# Altium PCB main.PcbDoc
Units mm, origin at the board's own origin, x right, y up, seen from the top; angles counter-clockwise.
Board outline 24 x 36 mm, 4 copper layers (Top Layer, Layer 1, Layer 2, Bottom Layer), stack 0.603 mm thick; 51 components, 58 nets, 239 pads, 65 vias.
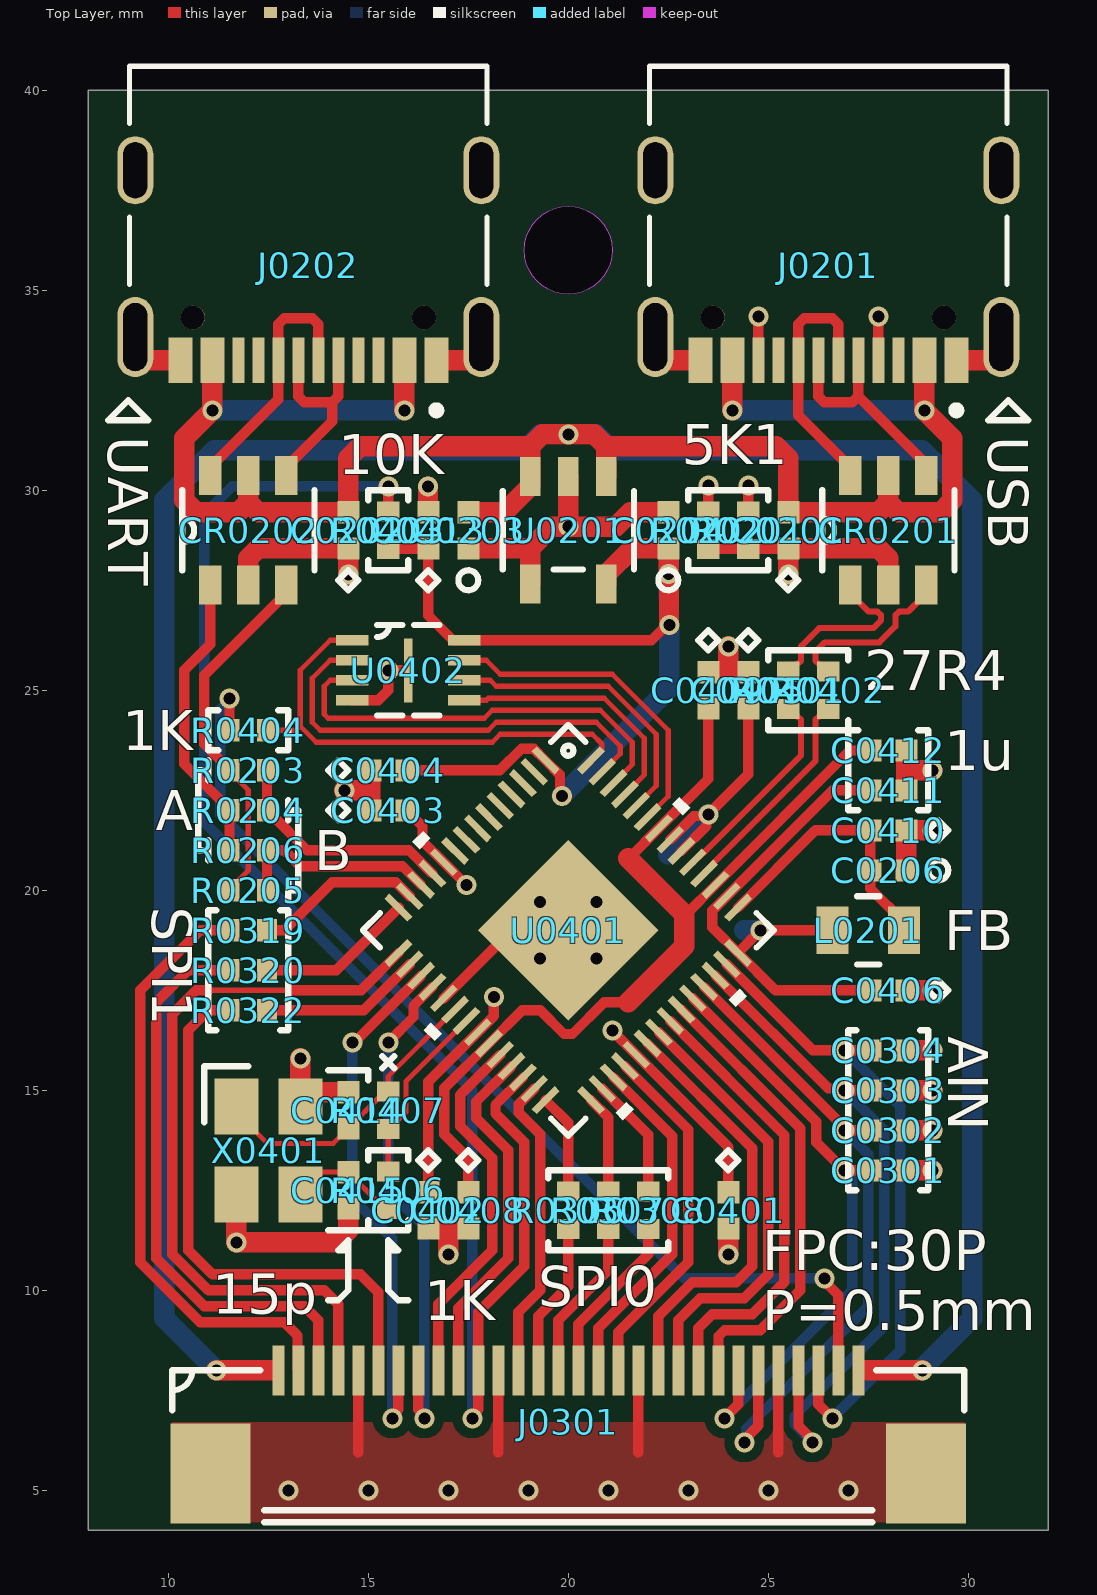
[diagram p0: Top Layer view]
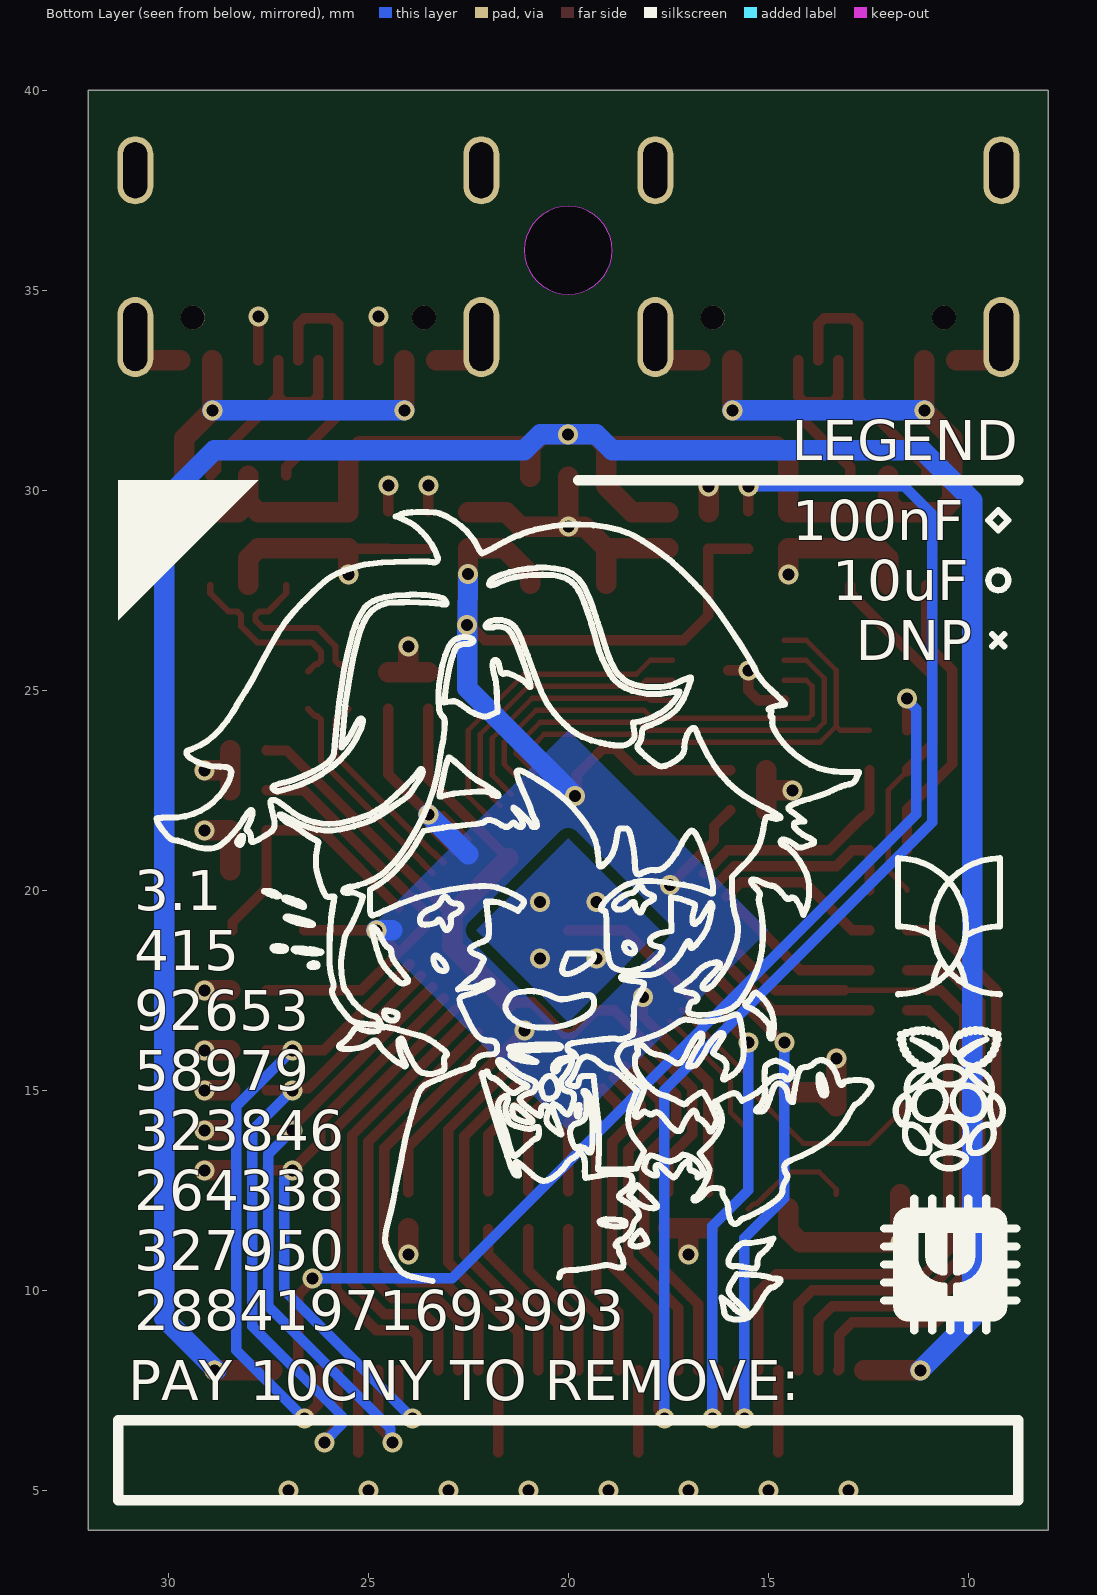
[diagram p1: Bottom Layer view, seen from below]
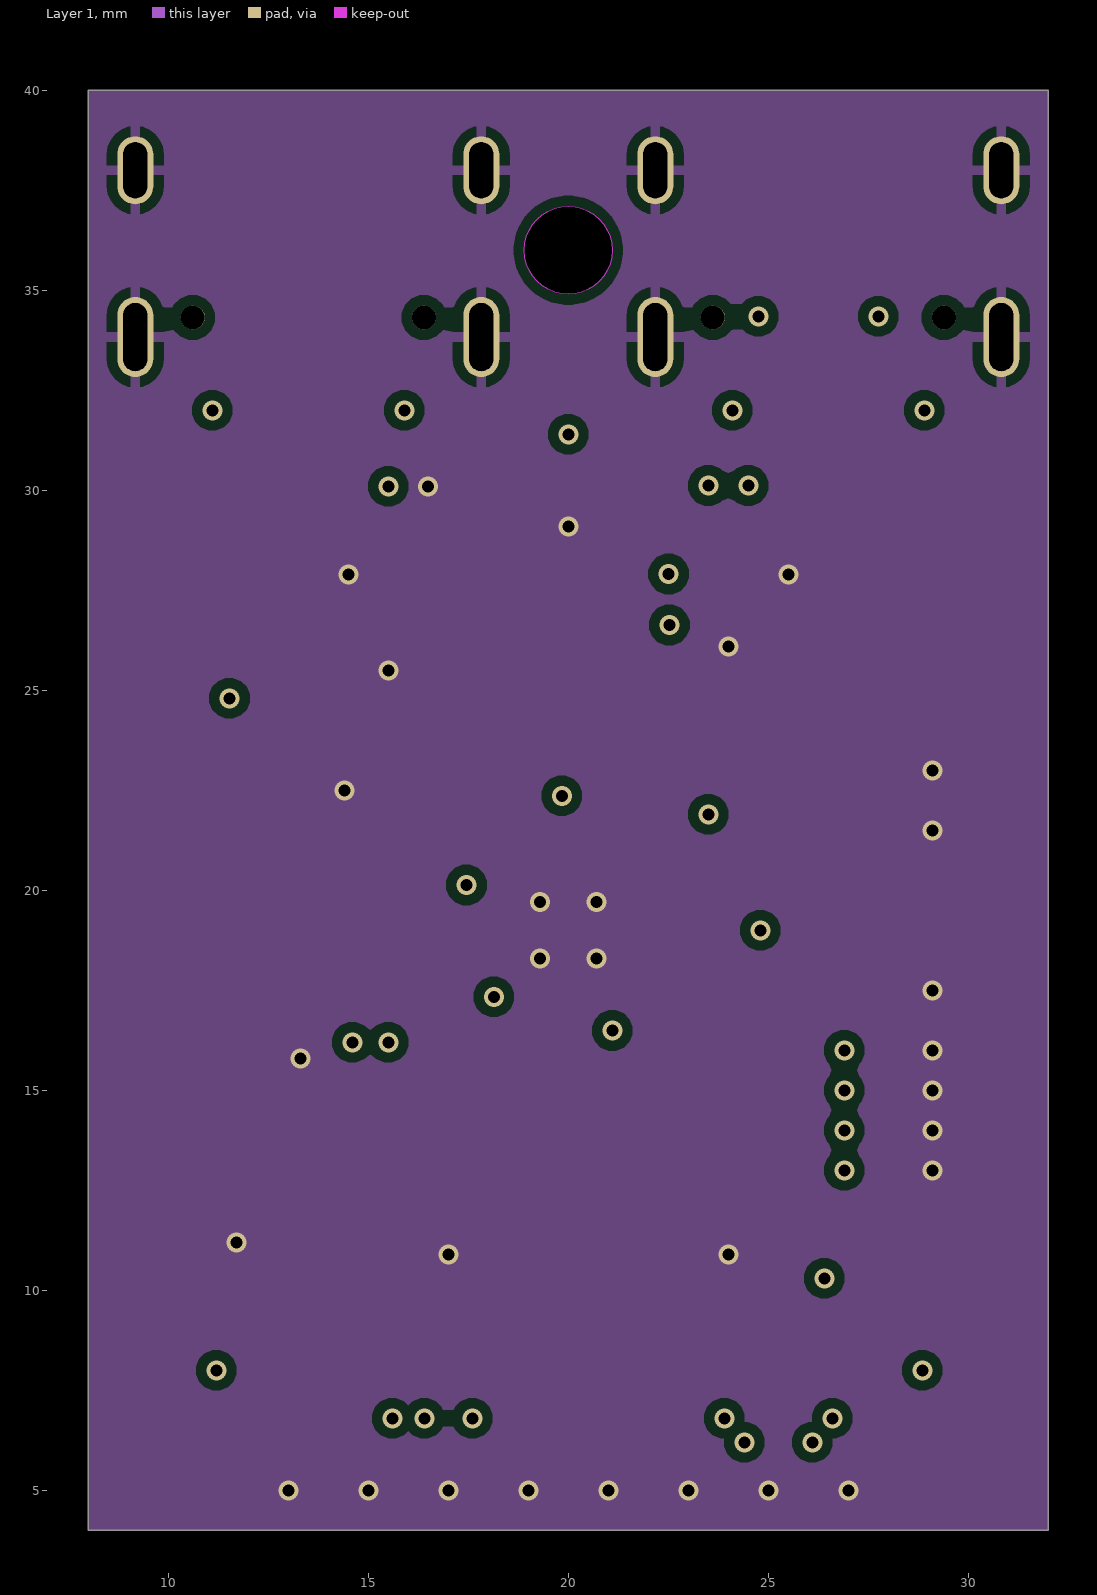
[diagram p2: Layer 1]
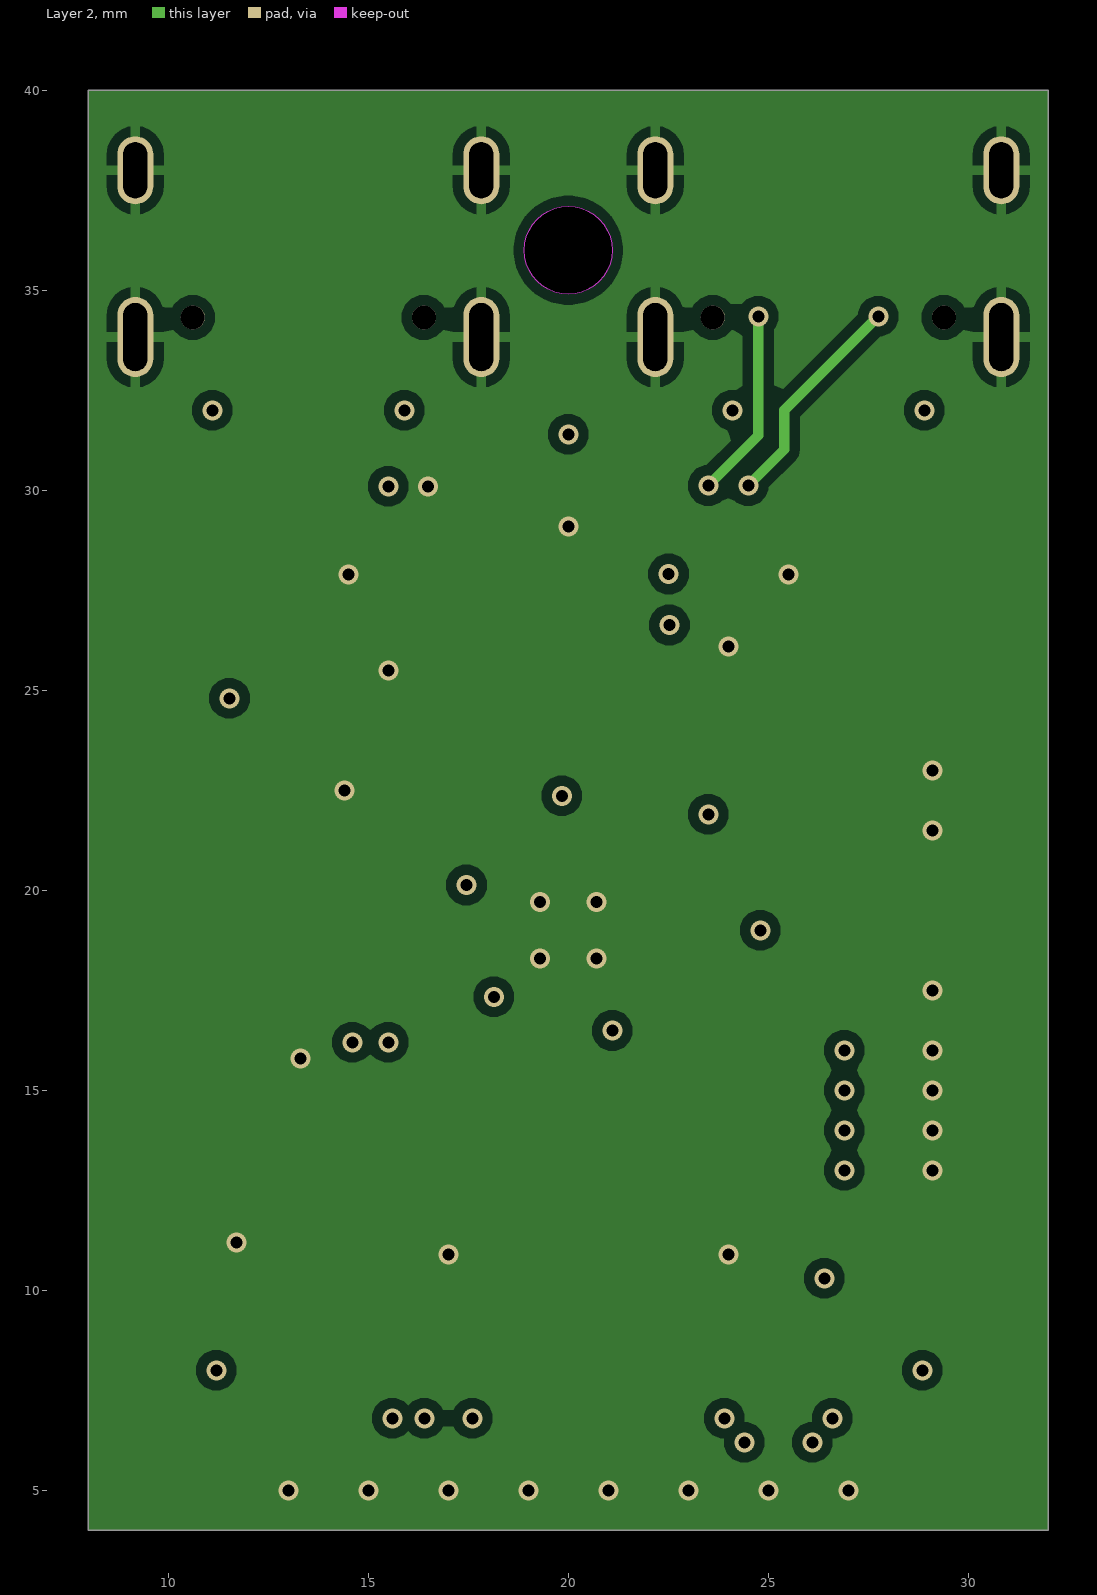
[diagram p3: Layer 2]
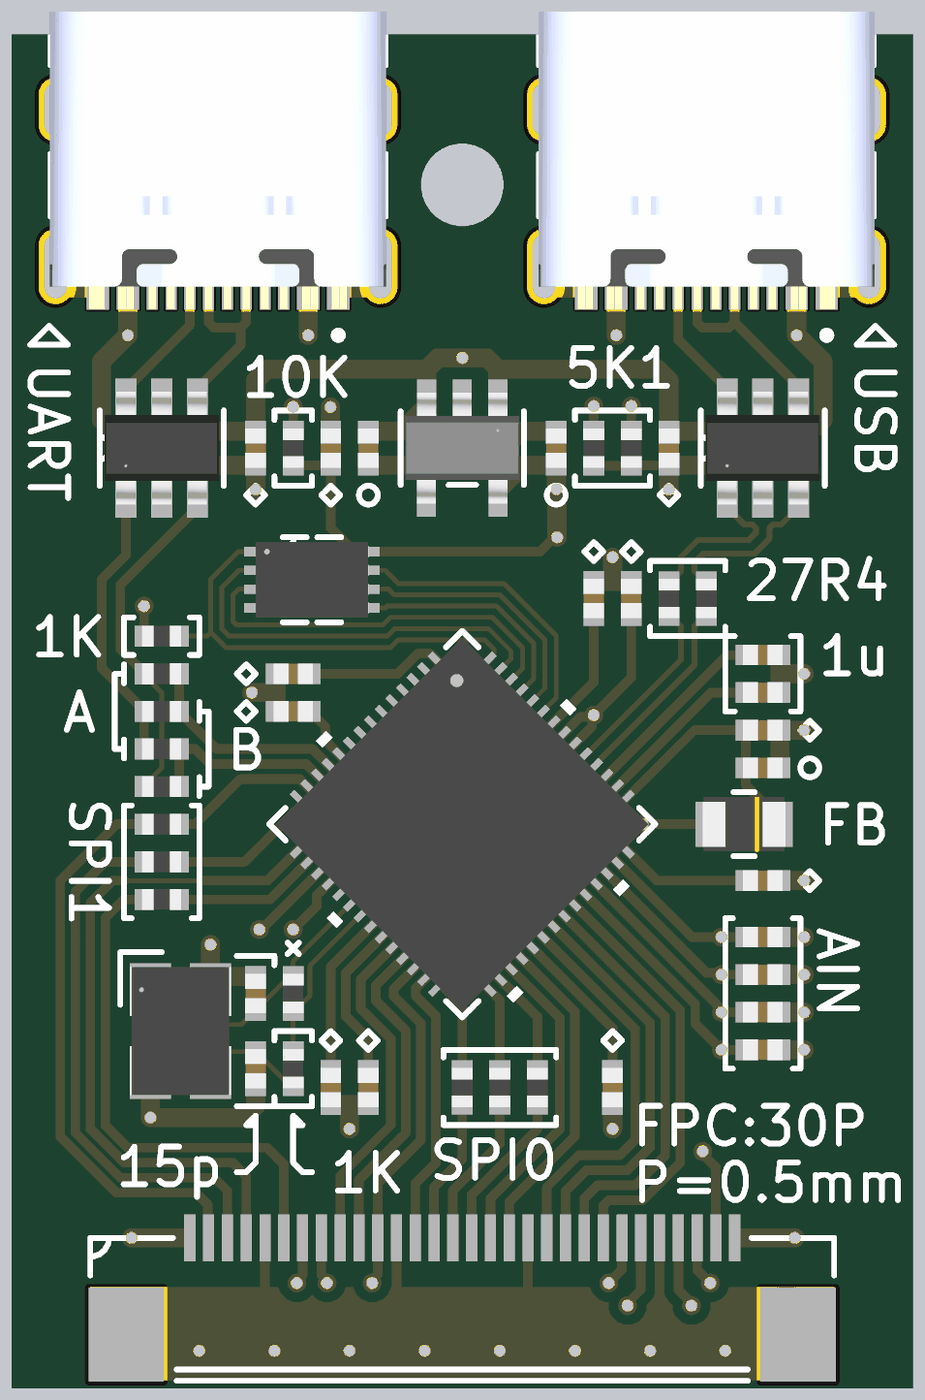
[diagram p4: 3D render of the assembled board from above, using the file's embedded part models]

## Layer stack, top to bottom
Top Solder: solder mask 0.0102, Solder Resist, Dk 3.5
Top Layer: signal copper 0.0356
Dielectric 2: prepreg 0.0711, PP-006, Dk 4.1
Layer 1: signal copper 0.035
Dielectric 1: dielectric 0.32, FR-4, Dk 4.8
Layer 2: signal copper 0.035
Dielectric 3: prepreg 0.0711, PP-006, Dk 4.1
Bottom Layer: signal copper 0.0356
Bottom Solder: solder mask 0.0102, Solder Resist, Dk 3.5

## Board outline
8,4 8,40 32,40 32,4
cut-out: 20,34.9 cw(c20,36) 18.9,36 cw(c20,36) 20,37.1 cw(c20,36) 21.1,36 cw(c20,36)

## Design rules (kind name [scope] priority, off if disabled: settings)
Clearance [All] p1: gap=0.254 ignorepadtopadclearanceinfootprint=FALSE except(0.1: Arc-Arc Arc-Track Arc-SMDPad Track-Track Track-SMDPad; 0.15: SMDPad-SMDPad; 0.2: Arc-Via Arc-Hole Track-Via Track-Hole SMDPad-Hole THPad-Hole)
DiffPairsRouting [All] p1: maxlimit=0.254 minlimit=0.203 mostfreqgap=0.254 toplayer_maxgap=0.203 toplayer_prefgap=0.203 toplayer_minwidth=0.155 toplayer_maxwidth=0.155 toplayer_prefwidth=0.155 midlayer1_mingap=0.254 midlayer1_minwidth=0.381 midlayer1_maxwidth=0.381 midlayer1_prefwidth=0.381 midlayer2_mingap=0.254 midlayer2_minwidth=0.381 midlayer2_maxwidth=0.381 midlayer2_prefwidth=0.381 bottomlayer_mingap=0.254 bottomlayer_minwidth=0.381 bottomlayer_maxwidth=0.381 bottomlayer_prefwidth=0.381 maxuncoupledlength=12.7
PolygonConnect [All] p1: thpad.connectstyle=Relief thpad.reliefconductorwidth=0.254 thpad.reliefentries=4 thpad.polygonreliefangle="90 Angle" thpad.airgapwidth=0.254 smdpad.connectstyle=Direct smdpad.reliefconductorwidth=0.254 smdpad.reliefentries=4 smdpad.polygonreliefangle="90 Angle" smdpad.airgapwidth=0.254 via.connectstyle=Direct via.reliefconductorwidth=0.254 via.reliefentries=4 via.polygonreliefangle="90 Angle" via.airgapwidth=0.254
RoutingVias [All] p1: holewidth=0.4 width=0.6 viastyle="Through Hole" minholewidth=0.3 minwidth=0.5 maxholewidth=0.6 maxwidth=0.8
SolderMaskExpansion [All] p1: expansion=0.102 istentingtop=FALSE
SupplyNets "Schematic Supply Nets_1" [InNet('+3V3A')] p1: voltage=0.000
SupplyNets "Schematic Supply Nets_4" [InNet('+1V1')] p2: voltage=0.000
SupplyNets "Schematic Supply Nets_3" [InNet('GND')] p3: voltage=0.000
SupplyNets "Schematic Supply Nets_2" [InNet('VBUS')] p4: voltage=0.000
SupplyNets "Schematic Supply Nets" [InNet('+3V3D')] p5: voltage=0.000
Width [All] p1: maxlimit=2.54 minlimit=0.127 preferedwidth=0.254 midlayer1_minwidth=0.254 midlayer1_maxwidth=0.254 midlayer2_minwidth=0.254 midlayer2_maxwidth=0.254 minimp=50.000000 maximp=50.000000 favimp=50.000000
29 further rules are at their usual default settings.

## Classes and differential pairs
component class sensor_array_interface: C0301 C0302 C0303 C0304 J0301 R0306 R0307 R0308 R0319 R0320 R0322
component class rp2040_core: C0401 C0402 C0403 C0404 C0405 C0406 C0408 C0409 C0410 C0411 C0412 C0413 C0414 C0415 R0401 R0402 R0403 R0404 R0406 R0407 U0401 U0402 X0401
component class peripherals: C0201 C0202 C0203 C0204 C0206 CR0201 CR0202 J0201 J0202 L0201 R0201 R0202 R0203 R0204 R0205 R0206 U0201
differential pair MCU_USB_D: +MCU_USB_D_P -MCU_USB_D_N
differential pair INT_USB_D: +INT_USB_D_P -INT_USB_D_N

## Components (designator, comment, footprint, x,y, rotation, side; value= is the part's Value field where it differs from the comment)
C0201 "100nF" CAPC10555_55N_KEM 25.5,29 r90 top
C0202 "100nF" CAPC10555_55N_KEM 14.5,29 r90 top
C0203 "10uF" CAPC10555_55N_KEM 17.5,29 r90 top
C0204 "10uF" CAPC10555_55N_KEM 22.5,29 r270 top
C0206 "10uF" CAPC10555_55N_KEM 28,20.5 r180 top
C0301 "1n" CAPC10555_55N_KEM 28,13 r180 top
C0302 "1n" CAPC10555_55N_KEM 28,14 r180 top
C0303 "1n" CAPC10555_55N_KEM 28,15 r180 top
C0304 "1n" CAPC10555_55N_KEM 28,16 r180 top
C0401 "100nF" CAPC10555_55N_KEM 24,12 r90 top
C0402 "100nF" CAPC10555_55N_KEM 16.5,12 r90 top
C0403 "100nF" CAPC10555_55N_KEM 15.5,22 r0 top
C0404 "100nF" CAPC10555_55N_KEM 15.5,23 r0 top
C0405 "100nF" CAPC10555_55N_KEM 24.5,25 r270 top
C0406 "100nF" CAPC10555_55N_KEM 28,17.5 r180 top
C0408 "100nF" CAPC10555_55N_KEM 17.5,12 r90 top
C0409 "100nF" CAPC10555_55N_KEM 23.5,25 r270 top
C0410 "100nF" CAPC10555_55N_KEM 28,21.5 r180 top
C0411 "1uF" CAPC10555_55N_KEM 28,22.5 r180 top
C0412 "1uF" CAPC10555_55N_KEM 28,23.5 r180 top
C0413 "100nF" CAPC10555_55N_KEM 16.5,29 r270 top
C0414 "15pF" CAPC10555_55N_KEM 14.5,14.5 r90 top
C0415 "15pF" CAPC10555_55N_KEM 14.5,12.5 r90 top
CR0201 "USBLC6-2SC6" SOT23-6L_STM 28,29 r90 top
CR0202 "USBLC6-2SC6" SOT23-6L_STM 12,29 r90 top
J0201 "TYPE-C-31-M-12" HRO_TYPE-C-31-M-12 26.5,38 r180 top
J0202 "TYPE-C-31-M-12" HRO_TYPE-C-31-M-12 13.5,38 r180 top
J0301 "FPC-05F-24PH20" FPC-05F-30PH20 20,8 r0 top
L0201 "MPZ2012S601A" IND_MPZ2012_TDK 27.5,19 r180 top
R0201 "5.1K" RES0402_CPF_TYCO_TYC 24.5,29 r90 top
R0202 "5.1K" RES0402_CPF_TYCO_TYC 23.5,29 r90 top
R0203 "0R" RES0402_CPF_TYCO_TYC 12,23 r0 top
R0204 "0R" RES0402_CPF_TYCO_TYC 12,22 r0 top
R0205 "0R" RES0402_CPF_TYCO_TYC 12,20 r0 top
R0206 "0R" RES0402_CPF_TYCO_TYC 12,21 r0 top
R0306 "33R" RES0402_CPF_TYCO_TYC 20,12 r90 top
R0307 "33R" RES0402_CPF_TYCO_TYC 21,12 r90 top
R0308 "33R" RES0402_CPF_TYCO_TYC 22,12 r90 top
R0319 "33R" RES0402_CPF_TYCO_TYC 12,19 r0 top
R0320 "33R" RES0402_CPF_TYCO_TYC 12,18 r0 top
R0322 "33R" RES0402_CPF_TYCO_TYC 12,17 r0 top
R0401 "27.4R" RES0402_CPF_TYCO_TYC 25.5,25 r270 top
R0402 "27.4R" RES0402_CPF_TYCO_TYC 26.5,25 r270 top
R0403 "10K" RES0402_CPF_TYCO_TYC 15.5,29 r90 top
R0404 "1K" RES0402_CPF_TYCO_TYC 12,24 r180 top
R0406 "1K" RES0402_CPF_TYCO_TYC 15.5,12.5 r90 top
R0407 "DNP" RES0402_CPF_TYCO_TYC 15.5,14.5 r270 top
U0201 "TPRT9013-33GB" SOT23-5_TCP 20,29 r270 top
U0401 "RP2040" IC57_RP2040 20,19 r315 top
U0402 "W25Q16JVUXIQ" W25Q16JVUXIQ_WIN 16,25.5 r0 top
X0401 "ABM8-272-T3" ABM8-272-T3_ABR 12.5,13.5 r0 top

## Footprints (in the part's own frame and the unit in brackets; to place one, negate y for a bottom-side part, rotate by r counter-clockwise, add the part's x,y. Pads: shape width x height; smd on the part's side, far side on the other; paste and mask are expansions set on the pad)
ABM8-272-T3_ABR [mm]
  rect 1.1x1.4 smd paste+0 mask+0: 1(-0.8,1.1) 2(-0.8,-1.1) 3(0.8,-1.1) 4(0.8,1.1)
  silkscreen extent -1.6,0.7 -0.5,2.1, body extent -1.35,-1.7 1.35,1.7, height 0.76
CAPC10555_55N_KEM [mm]
  rect 0.553x0.55 smd paste+0 mask+0: 1(-0.452,0) 2(0.452,0)
  body extent -0.53,-0.28 0.53,0.28, height 0.55
FPC-05F-30PH20 [mm]
  rect 0.3x1.25 smd mask+0: 1(-7.25,0) 2(-6.75,0) 3(-6.25,0) 4(-5.75,0) 5(-5.25,0) 6(-4.75,0) 7(-4.25,0) 8(-3.75,0) 9(-3.25,0) 10(-2.75,0) 11(-2.25,0) 12(-1.75,0) 13(-1.25,0) 14(-0.75,0) 15(-0.25,0) 16(0.25,0) 17(0.75,0) 18(1.25,0) 19(1.75,0) 20(2.25,0) 21(2.75,0) 22(3.25,0) 23(3.75,0) 24(4.25,0) 25(4.75,0) 26(5.25,0) 27(5.75,0) 28(6.25,0) 29(6.75,0) 30(7.25,0)
  rect 2x2.5 smd: P1(-8.94,-2.575) P2(8.94,-2.575)
  silkscreen extent -9.9,-3.8 9.9,0
HRO_TYPE-C-31-M-12 [mm]
  rect 0.6x1.14 smd mask+0.05: A1_B12(-3.2,4.75) A4_B9(-2.4,4.75) B1_A12(3.2,4.75) B4_A9(2.4,4.75)
  rect 0.3x1.14 smd mask+0.05: A5(-1.25,4.75) A6(-0.25,4.75) A7(0.25,4.75) A8(1.25,4.75) B5(1.75,4.75) B6(0.75,4.75) B7(-0.75,4.75) B8(-1.75,4.75)
  oval 0.9x2 hole 0.6 slot 1.7 at 90 deg: S1(-4.325,4.17) S2(4.325,4.17)
  oval 0.9x1.7 hole 0.6 slot 1.4 at 90 deg: S3(-4.325,0) S4(4.325,0)
  round 0.6 hole 0.6 unplated: ""(-2.89,3.68) ""(2.89,3.68)
  silkscreen extent -4.47,-2.6 4.47,6.1, body extent -4.47,-2.6 4.47,5.31, height 3.31
IC57_RP2040 [mil]
  rect 32x7 smd paste+0 mask+0: 1(-134,102.36) 2(-134,86.61) 3(-134,70.87) 4(-134,55.12) 5(-134,39.37) 6(-134,23.62) 7(-134,7.87) 8(-134,-7.87) 9(-134,-23.62) 10(-134,-39.37) 11(-134,-55.12) 12(-134,-70.87) 13(-134,-86.61) 14(-134,-102.36) 29(134,-102.36) 30(134,-86.61) 31(134,-70.87) 32(134,-55.12) 33(134,-39.37) 34(134,-23.62) 35(134,-7.87) 36(134,7.87) 37(134,23.62) 38(134,39.37) 39(134,55.12) 40(134,70.87) 41(134,86.61) 42(134,102.36)
  rect 7x32 smd paste+0 mask+0: 15(-102.36,-134) 16(-86.61,-134) 17(-70.87,-134) 18(-55.12,-134) 19(-39.37,-134) 20(-23.62,-134) 21(-7.87,-134) 22(7.87,-134) 23(23.62,-134) 24(39.37,-134) 25(55.12,-134) 26(70.87,-134) 27(86.61,-134) 28(102.36,-134) 43(102.36,134) 44(86.61,134) 45(70.87,134) 46(55.12,134) 47(39.37,134) 48(23.62,134) 49(7.87,134) 50(-7.87,134) 51(-23.62,134) 52(-39.37,134) 53(-55.12,134) 54(-70.87,134) 55(-86.61,134) 56(-102.36,134)
  rect 126x126 smd paste-63 mask+0: 57(0,0)
  silkscreen extent -170,-170 170,170, body extent -138,-138 138,138, height 35
IND_MPZ2012_TDK [mil]
  rect 31.5x47 smd paste+0 mask+0: 1(-35.25,0) 2(35.25,0)
  silkscreen extent -11,-34 11,34, body extent -44,-29 44,29, height 41
RES0402_CPF_TYCO_TYC [mil]
  rect 20x22 smd paste+0 mask+0: 1(-18.5,0) 2(18.5,0)
  body extent -21,-11 21,11, height 14
SOT23-5_TCP [mil]
  rect 38.5x20 smd paste+0 mask+0: 1(-52.75,37.4) 2(-52.75,0) 3(-52.75,-37.4) 4(52.75,-37.5) 5(52.75,37.5)
  silkscreen extent -39,-64 39,64, body extent -58,-59 58,59, height 49
SOT23-6L_STM [mil]
  rect 38.5x22 smd paste+0 mask+0: 1(-53.75,37.4) 2(-53.75,0) 3(-53.75,-37.4) 4(53.75,-37.4) 5(53.75,0) 6(53.75,37.4)
  silkscreen extent -40,-65 40,65, body extent -59,-60 59,60, height 57
W25Q16JVUXIQ_WIN [mil]
  rect 32x10 smd paste+0 mask+0: 1(-55.06,29.53) 2(-55.06,9.84) 3(-55.06,-9.84) 4(-55.06,-29.53) 5(55.06,-29.53) 6(55.06,-9.84) 7(55.06,9.84) 8(55.06,29.53)
  rect 8x63 smd paste+0 mask+0: 9(0,0)
  silkscreen extent -31,-44 31,44, body extent -59,-39 59,39, height 24

## Part data
C0201 C0202 C0203 C0204 C0206 C0301 C0302 C0303 C0304 C0401 C0402 C0403 C0404 C0405 C0406 C0408 C0409 C0410 C0411 C0412 C0413 C0414 C0415: library part C0402, "SMD Comm X7R, Ceramic, SMD, MLCC, Temperature Stable, 0402", Manufacturer_Name=Kemet, Manufacturer_Part_Number=C0402C104K4RACTU, Copyright="Copyright (C) 2025 Ultra Librarian. All rights reserved.", Datasheet=https://content.kemet.com/datasheets/KEM_C1002_X7R_SMD.pdf
CR0201 CR0202: "ESD Protection for USB 2.0 High Speed", Manufacturer_Name=STMicroelectronics, Copyright="Copyright (C) 2025 Ultra Librarian. All rights reserved.", Datasheet=https://www.st.com/resource/en/datasheet/usblc6-2.pdf, Manufacturer_Part_Number=USBLC6-2SC6, RefDes=RefDes, Type=Type
J0201 J0202: "USB Connectors 24 Receptacle 1 8.94*7.3mm RoHS", Package=Package, Check_prices=https://www.snapeda.com/parts/TYPE-C-31-M-12/HRO+Electronics+Co.%252C+Ltd./view-part/?ref=eda, MF="HRO Electronics Co., Ltd.", MP=TYPE-C-31-M-12, SnapEDA_Link=https://www.snapeda.com/parts/TYPE-C-31-M-12/HRO+Electronics+Co.%252C+Ltd./view-part/?ref=snap
J0301: library part FPC-05F-24PH20_1, "30 Pin 0.5 Pitch FPC connector"
L0201: "No Description Available", Manufacturer_Name=TDK, Copyright="Copyright (C) 2025 Ultra Librarian. All rights reserved.", Manufacturer_Part_Number=MPZ2012S601A
R0201 R0202 R0203 R0204 R0205 R0206 R0306 R0307 R0308 R0319 R0320 R0322 R0401 R0402 R0403 R0404 R0406 R0407: library part R0402, "CPF 0402 RL", Manufacturer_Name="TE Connectivity", Manufacturer_Part_Number=CPF0402B33RE1, Copyright="Copyright (C) 2025 Ultra Librarian. All rights reserved.", Datasheet=https://www.te.com/commerce/DocumentDelivery/DDEController?Action=srchrtrv&DocNm=1773200&DocType=Data+Sheet&DocLang=English&PartCntxt=1-1879208-3&DocFormat=pdf
U0201: "No Description Available", Manufacturer_Name="Tech Public", Copyright="Copyright (C) 2025 Ultra Librarian. All rights reserved.", Manufacturer_Part_Number=TPRT9013-33GB, RefDes=RefDes, Type="Power Management"
U0401: "No Description Available", Manufacturer_Name="Raspberry Pi", Copyright="Copyright (C) 2025 Ultra Librarian. All rights reserved.", Manufacturer_Part_Number=RP2040, RefDes=RefDes, Type=Type
U0402: "No Description Available", Manufacturer_Name=Winbond, Copyright="Copyright (C) 2025 Ultra Librarian. All rights reserved.", Manufacturer_Part_Number=W25Q16JVUXIQ, RefDes=RefDes, Type=Type
X0401: "No Description Available", Manufacturer_Name=Abracon, Copyright="Copyright (C) 2025 Ultra Librarian. All rights reserved.", Manufacturer_Part_Number=ABM8-272-T3, RefDes=RefDes, Type=Crystals

## Via types
v1: diameter 0.5, hole 0.3, Top Layer to Bottom Layer, tented both sides, 65 vias

## Nets (pads, with @x,y where several pads share a name; then routed paths per layer and width w, separated by ;. In a path a pad name is that pad's centre, name@x,y a point inside that pad or via, vN(x,y) a via of type N, cw(c..) or ccw(c..) an arc to the next point about the centre after c; other vN are vias at no path point)
+1V1: C0408.2 C0409.2 C0412.2 U0401.23 U0401.45 U0401.50 | length 24.5
  Top Layer w0.254: C0408.2 17.5,13.3 16.9,13.9 16.9,15.051 U0401.23 18.849,17 19.3,17 19.895,16.405 20.105,16.405 20.9,17.2 21.5,17.2 ; 21.5,20.8 21.517,20.8 U0401.50 23.5,22.783 C0409.2 ; 22.9,19.4 22.946,19.4 U0401.45 27.039,23.494 27.542,23.494 C0412.2
  Top Layer w0.508: 21.5,17.2 22.9,18.6 22.9,19.4 21.5,20.8
+3V3A: C0206.2 C0410.2 L0201.1 U0401.43 | length 7
  Top Layer w0.254: U0401.43 26.177,21.5 C0410.2 C0206.2 27.548,20.044 28.395,19.197 L0201.1
+3V3D: C0204.2 C0401.2 C0402.2 C0403.2 C0404.2 C0405.2 C0406.2 C0411.2 C0413.2 L0201.2 R0403.1 U0201.5 U0401.1 U0401.10 U0401.22 U0401.33 U0401.42 U0401.44 U0401.48 U0401.49 U0402.8 | length 58
  Top Layer w0.254: R0403.1 15.509,28.539 16.491,28.539 C0413.2 16.5,26.869 17.119,26.25 U0402.8 22.079,26.25 22.46,26.631 22.518,26.631 v1(22.527,26.631) ; C0403.2 15.954,22 16.356,21.597 16.356,21.229 U0401.10 v1(17.454,20.132) ; C0404.2 18.291,23 18.83,23.54 19.137,23.54 U0401.1 19.79,22.887 19.79,22.41 v1(19.837,22.363) ; C0402.2 16.5,15.217 U0401.22 18.137,16.854 v1(18.137,17.337) ; v1@21.1,16.486 U0401.33 24,13.586 C0401.2 ; U0401.49 23.136,21.853 v1@23.453,21.853 ; U0401.48 23.453,21.604 v1@23.453,21.853 ; C0405.2 24.5,22.9 v1(23.5,21.9) v1@23.453,21.853 ; L0201.2 v1(24.8,19) 24.245,18.445 U0401.42 ; C0406.2 25.177,17.5 U0401.42 ; C0411.2 26.611,22.5 U0401.44 23.6,19.489 23.6,19.077 U0401.42
  Top Layer w0.508: U0201.5 20.953,27.895 21.605,28.548 C0204.2 ; v1(22.509,27.909) C0204.2@22.509,28.548 ; v1@22.518,26.631 v1@22.518,27.918
  Bottom Layer w0.508: v1(19.837,22.363) 22.527,25.053 v1(22.527,26.631) ; 22.5,20.9 v1(23.5,21.9) ; v1(22.509,27.909) v1@22.518,26.631 ; 24.4,19 v1(24.8,19)
  other v1: 21.1,16.493
BOOT_N: J0301.29 R0404.2 | length 26.1
  Top Layer w0.254: R0404.2 v1(11.53,24.8) ; v1(26.4,10.3) 26.4,10.233 26.75,9.883 J0301.29
  Bottom Layer w0.254: v1(11.53,24.8) 11.53,24.758 11.3,24.528 11.3,21.9 22.9,10.3 v1(26.4,10.3)
FPC_GPIO_10: J0301.2 R0319.1 | length 15.2
  Top Layer w0.254: R0319.1 10.8,19 9.3,17.5 9.3,10.7 10.8,9.2 12.9,9.2 13.227,8.873 13.227,8.023 J0301.2
FPC_GPIO_11: J0301.3 R0320.1 | length 14.5
  Top Layer w0.254: R0320.1 10.5,18 9.7,17.2 9.7,10.801 10.901,9.6 13.4,9.6 13.75,9.25 J0301.3
FPC_GPIO_12: J0301.4 U0401.15 | length 18.6
  Top Layer w0.127: 11,17.5 13.1,17.5
  Top Layer w0.254: 11,17.5 10.7,17.5 10.1,16.9 10.1,10.901 11.001,10 13.9,10 14.25,9.65 J0301.4 ; 13.1,17.5 14.823,17.5 U0401.15
FPC_GPIO_13: J0301.6 R0322.1 | length 13.9
  Top Layer w0.254: R0322.1 11,17 10.5,16.5 10.5,11.002 11.102,10.4 14.8,10.4 15.25,9.95 J0301.6
FPC_GPIO_14: J0301.7 U0401.17 | length 13.5
  Top Layer w0.254: v1(14.6,16.2) 14.654,16.2 U0401.17 ; v1(15.6,6.8) 15.6,6.867 15.75,7.017 J0301.7
  Bottom Layer w0.254: v1(14.6,16.2) 14.6,12.3 15.6,11.3 v1(15.6,6.8)
FPC_GPIO_15: J0301.8 U0401.18 | length 12.9
  Top Layer w0.254: v1(15.5,16.2) 16.131,16.831 16.131,17.111 U0401.18 ; J0301.8 16.25,7.017 16.4,6.867 v1(16.4,6.8)
  Bottom Layer w0.254: v1(15.5,16.2) 15.5,12.5 16.4,11.6 v1(16.4,6.8)
FPC_GPIO_16: J0301.13 U0401.27 | length 7.6
  Top Layer w0.254: J0301.13 18.75,9.45 19.3,10 19.3,13.9 18.761,14.439 18.761,14.65 U0401.27
FPC_GPIO_17: J0301.14 R0306.1 | length 3.8
  Top Layer w0.254: J0301.14 19.25,9.35 20,10.1 R0306.1
FPC_GPIO_18: J0301.15 R0307.1 | length 4
  Top Layer w0.254: J0301.15 19.75,9.25 21,10.5 R0307.1
FPC_GPIO_19: J0301.16 R0308.1 | length 4.3
  Top Layer w0.254: J0301.16 20.25,9.15 22,10.9 R0308.1
FPC_GPIO_20: J0301.17 U0401.31 | length 8.7
  Top Layer w0.254: J0301.17 20.75,9.05 22.6,10.9 22.6,13.854 U0401.31
FPC_GPIO_21: J0301.18 U0401.32 | length 9
  Top Layer w0.254: J0301.18 21.25,8.95 23,10.7 23,14.02 U0401.32
FPC_GPIO_22: J0301.20 U0401.34 | length 10.9
  Top Layer w0.254: U0401.34 24.6,13.551 24.6,10.6 24.2,10.2 23.1,10.2 22.25,9.35 J0301.20
FPC_GPIO_23: J0301.21 U0401.35 | length 11.2
  Top Layer w0.254: U0401.35 25,13.717 25,10.4 24.4,9.8 23.3,9.8 22.75,9.25 J0301.21
FPC_GPIO_24: J0301.22 U0401.36 | length 11.4
  Top Layer w0.254: U0401.36 25.4,13.883 25.4,10.2 24.6,9.4 23.6,9.4 23.25,9.05 J0301.22
FPC_GPIO_25: J0301.23 U0401.37 | length 11.6
  Top Layer w0.254: U0401.37 25.8,14.049 25.8,10 24.8,9 23.903,9 23.755,8.851 23.755,8.005 J0301.23
FPC_GPIO_26: C0301.2 J0301.24 U0401.38 | length 15.5
  Top Layer w0.254: U0401.38 26.2,14.214 26.2,13.7 v1(26.9,13) C0301.2 ; v1(23.9,6.8) 24.25,7.15 J0301.24
  Bottom Layer w0.254: v1(23.9,6.8) 27.1,10 27.1,12.8 v1(26.9,13)
FPC_GPIO_27: C0302.2 J0301.25 U0401.39 | length 17
  Top Layer w0.254: U0401.39 26.853,14.127 26.853,14.047 v1(26.9,14) C0302.2 ; v1(24.4,6.2) 24.4,6.267 24.75,6.617 J0301.25
  Bottom Layer w0.254: v1(24.4,6.2) 24.442,6.242 24.442,6.542 27.5,9.6 27.5,13.4 v1(26.9,14)
FPC_GPIO_28: C0303.2 J0301.27 U0401.40 | length 17.3
  Top Layer w0.254: U0401.40 26.499,15.047 26.853,15.047 v1(26.9,15) C0303.2 ; J0301.27 25.754,7.996 25.754,6.613 26.1,6.267 v1(26.1,6.2)
  Bottom Layer w0.254: v1(26.1,6.2) 25.655,6.645 25.655,6.855 27.9,9.1 27.9,14 v1(26.9,15)
FPC_GPIO_29: C0304.2 J0301.28 U0401.41 | length 16.3
  Top Layer w0.254: U0401.41 26.111,16 v1(26.9,16) C0304.2 ; J0301.28 26.25,7.15 v1(26.6,6.8)
  Bottom Layer w0.254: v1(26.6,6.8) 28.3,8.5 28.3,14.6 v1(26.9,16)
GND: C0201.1 C0202.1 C0203.1 C0204.1 C0206.1 C0301.1 C0302.1 C0303.1 C0304.1 C0401.1 C0402.1 C0403.1 C0404.1 C0405.1 C0406.1 C0408.1 C0409.1 C0410.1 C0411.1 C0412.1 C0413.1 C0414.2 C0415.1 CR0201.2 CR0202.2 J0201.A1_B12 J0201.B1_A12 J0201.S1 J0201.S2 J0201.S3 J0201.S4 J0202.A1_B12 J0202.B1_A12 J0202.S1 J0202.S2 J0202.S3 J0202.S4 J0301.5 J0301.12 J0301.19 J0301.26 J0301.P1 J0301.P2 R0201.1 R0202.1 U0201.2 U0201.4 U0401.19 U0401.57 U0402.4 U0402.9 X0401.2 X0401.4 | length 57.5
  Top Layer w0.254: U0402.4 15.25,24.75 15.5,25 v1(15.5,25.5) U0402.9 ; 14.75,5.95 J0301.5 ; U0401.19 18.586,19 U0401.57 ; 18.25,5.95 J0301.12 ; 21.75,5.95 J0301.19 ; R0202.1 R0201.1 24.509,28.539 25.491,28.539 C0201.1 ; 25.25,5.95 J0301.26
  Top Layer w0.508: J0202.S2 9.175,33.548 9.473,33.25 J0202.B1_A12 ; X0401.2 v1(11.7,11.2) 14.2,11.2 14.5,11.5 C0415.1 ; CR0202.2 12,28.3 12.248,28.548 C0202.1 v1(14.5,27.9) ; v1(13.3,15.8) X0401.4 13.652,14.952 C0414.2 ; v1(14.4,22.5) 15.048,22.5 ; C0403.1 15.048,22.5 ; C0404.1 15.048,22.5 ; C0413.1@16.491,29.443 v1(16.491,30.091) ; C0402.1 17,11.548 ; J0202.A1_B12 17.527,33.25 17.825,33.548 J0202.S1 ; v1(17,10.9) 17,11.548 ; C0408.1 17,11.548 ; C0203.1 19.048,28.548 ; U0201.4 19.048,28.548 ; U0201.2 v1(20,29.09) ; J0201.S2 22.175,33.548 22.473,33.25 J0201.B1_A12 ; C0204.1 21.552,29.452 21.19,29.09 v1(20,29.09) ; C0409.1 24,25.452 ; v1(24,10.9) C0401.1 ; v1(24,26.1) 24,25.452 ; C0405.1 24,25.452 ; v1(25.5,27.9) C0201.1 27.752,28.548 28,28.3 CR0201.2 ; C0301.1 v1(29.1,13) ; C0302.1 v1(29.1,14) ; C0303.1 v1(29.1,15) ; C0304.1 v1(29.1,16) ; C0406.1 v1(29.1,17.5) ; C0206.1 C0410.1 v1(29.1,21.5) ; C0411.1 28.452,23 ; C0412.1 28.452,23 ; v1(29.1,23) 28.452,23 ; J0201.A1_B12 30.527,33.25 30.825,33.548 J0201.S1 ; 19.048,28.548 19.59,29.09 v1(20,29.09)
  other v1: 13,5 15,5 17,5 19,5 21,5 23,5 25,5 27,5 19.291,18.291 20.709,18.291 19.291,19.709 20.709,19.709
INT_LINK_N: CR0202.3 R0203.1 R0205.1 | length 9.1
  Top Layer w0.127: R0205.1 11.53,20.025 12,20.495 12,22.505 R0203.1@11.53,22.975
  Top Layer w0.254: R0203.1@11.53,22.975 R0203.1 11.53,23.025 10.9,23.655 10.9,25.375 12.95,27.425 CR0202.3
INT_LINK_P: CR0202.1 R0204.1 R0206.1 | length 7.4
  Top Layer w0.254: CR0202.1 11.05,26.15 10.4,25.5 10.4,23.155 11.53,22.025 R0204.1 R0206.1
INT_USB_D_N: CR0201.3 R0402.1 | length 4.4
  Top Layer w0.155: R0402.1 26.324,25.646 26.27,25.646 26.179,25.737 26.179,25.957 26.417,26.195 27.775,26.195 28.179,26.6 28.179,26.877 28.27,26.968 28.493,26.968 28.95,27.425 CR0201.3
INT_USB_D_P: CR0201.1 R0401.1 | length 4.4
  Top Layer w0.155: R0401.1 25.676,25.646 25.73,25.646 25.821,25.737 25.821,26.106 26.269,26.554 27.626,26.554 27.821,26.748 27.821,26.877 27.73,26.968 27.507,26.968 27.05,27.425 CR0201.1
LINK_N: CR0202.4 J0202.A7 J0202.B7 | length 5.2
  Top Layer w0.254: CR0202.4 12.95,30.575 14.1,31.725 14.1,32.2 ; J0202.A7 13.25,32.35 13.4,32.2 14.1,32.2 ; J0202.B7 14.25,32.35 14.1,32.2
LINK_P: CR0202.6 J0202.A6 J0202.B6 | length 6.5
  Top Layer w0.254: CR0202.6 11.05,30.575 12.75,32.275 J0202.B6 12.75,34.15 12.9,34.3 13.6,34.3 13.75,34.15 J0202.A6
MCU_CLK: J0301.9 U0401.24 | length 9.2
  Top Layer w0.254: J0301.9 16.75,9.65 18.1,11 18.1,13.3 17.3,14.1 17.3,14.886 U0401.24
MCU_DIO: J0301.10 U0401.25 | length 8.8
  Top Layer w0.254: J0301.10 17.25,9.55 18.5,10.8 18.5,13.5 17.7,14.3 17.7,14.72 U0401.25
MCU_GPIO_10: R0319.2 U0401.13 | length 4.2
  Top Layer w0.254: R0319.2 12.9,19 14.1,20.2 15.689,20.2 U0401.13
MCU_GPIO_11: R0320.2 U0401.14 | length 3.9
  Top Layer w0.254: R0320.2 14.2,18 U0401.14@15.762,19.562
MCU_GPIO_13: R0322.2 U0401.16 | length 4
  Top Layer w0.254: R0322.2 14.889,17 U0401.16
MCU_GPIO_17: R0306.2 U0401.28 | length 2.5
  Top Layer w0.254: U0401.28 20,14.187 R0306.2
MCU_GPIO_18: R0307.2 U0401.29 | length 2.5
  Top Layer w0.254: U0401.29 21,14.323 R0307.2
MCU_GPIO_19: R0308.2 U0401.30 | length 3
  Top Layer w0.254: U0401.30 22,13.889 R0308.2
MCU_LINK_N: R0203.2 R0204.2 U0401.11 | length 5.8
  Top Layer w0.254: R0203.2 R0204.2 12.47,21.975 12.597,21.848 12.622,21.848 13.47,21 16.02,21 U0401.11
MCU_LINK_P: R0205.2 R0206.2 U0401.12 | length 5.2
  Top Layer w0.254: R0205.2 R0206.2 12.9,21 13.3,20.6 15.854,20.6 U0401.12
MCU_RUN: J0301.11 R0403.2 U0401.26 | length 40.5
  Top Layer w0.254: R0403.2 v1(15.5,30.1) ; v1(17.6,6.8) 17.6,6.867 17.75,7.017 J0301.11 17.75,9.45 18.9,10.6 18.9,13.7 18.178,14.422 18.178,14.632 U0401.26
  Bottom Layer w0.254: v1(15.5,30.1) 11.6,30.1 10.9,29.4 10.9,21.7 17.6,15 v1(17.6,6.8)
MCU_USB_D_N: R0402.2 U0401.46 | length 5.4
  Top Layer w0.155: U0401.46 23.397,20.433 23.637,20.673 23.637,20.686 26.179,23.229 26.179,24.263 26.27,24.354 26.324,24.354 R0402.2
MCU_USB_D_P: R0401.2 U0401.47 | length 5.1
  Top Layer w0.155: U0401.47 23.13,20.7 23.37,20.94 23.383,20.94 25.821,23.377 25.821,24.263 25.73,24.354 25.676,24.354 R0401.2
NetJ0201_A5: J0201.A5 R0201.2 | length 7.3
  Top Layer w0.254: R0201.2 v1(24.5,30.118) ; J0201.A5 v1(27.75,34.35)
  Layer 2 w0.254: v1(24.5,30.118) 25.4,31.018 25.4,32 v1(27.75,34.35)
NetJ0201_B5: J0201.B5 R0202.2 | length 6.5
  Top Layer w0.254: R0202.2 v1(23.5,30.118) ; J0201.B5 v1(24.75,34.35)
  Layer 2 w0.254: v1(23.5,30.118) 24.75,31.368 v1(24.75,34.35)
QSPI_SCLK: U0401.52 U0402.6 | length 7.4
  Top Layer w0.127: U0402.6 18.05,25.25 18.2,25.1 21,25.1 22.2,23.9 22.2,22.614 U0401.52
QSPI_SD0: U0401.53 U0402.5 | length 6.5
  Top Layer w0.127: U0402.5 17.95,24.75 18,24.8 20.9,24.8 21.9,23.8 21.9,22.88 U0401.53
QSPI_SD1: U0401.55 U0402.2 | length 11.2
  Top Layer w0.127: U0402.2 14.05,25.75 13.6,25.3 13.6,24.2 13.8,24 18,24 18.2,24.2 20.7,24.2 21.3,23.6 21.3,23.411 U0401.55
QSPI_SD2: U0401.54 U0402.3 | length 10.8
  Top Layer w0.127: U0402.3 14.05,25.25 13.9,25.1 13.9,24.4 14,24.3 17.9,24.3 18.1,24.5 20.8,24.5 21.6,23.7 21.6,23.146 U0401.54
QSPI_SD3: U0401.51 U0402.7 | length 8.2
  Top Layer w0.127: U0402.7 17.95,25.75 18.3,25.4 21.1,25.4 22.5,24 22.5,22.349 U0401.51
QSPI_SS: R0404.1 U0401.56 U0402.1 | length 12.3
  Top Layer w0.127: R0404.1 13.2,24 13.3,24.1 ; U0402.1 14.05,26.25 13.3,25.5 13.3,24.1 ; U0401.56 20.841,23.518 20.841,23.659 20.6,23.9 18.3,23.9 18.1,23.7 13.7,23.7 13.3,24.1
USB_D_N: CR0201.4 J0201.A7 J0201.B7 | length 5.6
  Top Layer w0.254: J0201.A7 26.25,32.35 26.4,32.2 27.1,32.2 27.25,32.35 ; J0201.B7 27.25,32.35 ; CR0201.4 28.798,30.518 28.798,30.802 27.25,32.35
USB_D_P: CR0201.6 J0201.A6 J0201.B6 | length 6.3
  Top Layer w0.254: J0201.A6 26.75,34.15 26.6,34.3 25.9,34.3 25.75,34.15 J0201.B6 25.75,31.875 27.05,30.575 CR0201.6
VBUS: C0201.2 C0202.2 C0203.2 CR0201.5 CR0202.5 J0201.A4_B9 J0201.B4_A9 J0202.A4_B9 J0202.B4_A9 J0301.1 J0301.30 U0201.1 U0201.3 | length 116.6
  Top Layer w0.508: J0202.B4_A9 v1(11.1,32) 10.4,31.3 10.4,29.746 10.694,29.452 11.752,29.452 12,29.7 ; v1(11.2,8) J0301.1@12.6,8 ; CR0202.5 12,29.7 ; v1(15.9,32) J0202.A4_B9 ; C0203.2 18.397,29.452 19.05,30.105 U0201.3 19.05,31.1 ; U0201.1 20.95,31.1 ; v1(24.1,32) J0201.B4_A9 ; J0301.30@27.4,8 v1(28.85,8) ; CR0201.5 28,29.7 ; J0201.A4_B9 v1(28.9,32) 29.6,31.3 29.6,29.746 29.306,29.452 28.248,29.452 28,29.7 ; 12,29.7 12.248,29.452 C0202.2 14.5,30.802 14.798,31.1 19.05,31.1 ; 19.05,31.1 19.35,31.4 v1(20.001,31.4) 20.652,31.4 20.95,31.102 20.95,31.1 ; 20.95,31.1 25.202,31.1 25.5,30.802 C0201.2 27.752,29.452 28,29.7
  Bottom Layer w0.508: v1(11.1,32) v1(15.9,32) ; v1(11.2,8) 9.9,9.3 9.9,29.75 11.15,31 18.9,31 19.3,31.4 v1(20.001,31.4) 20.702,31.4 21.102,31 28.852,31 30.102,29.75 30.102,9.3 ; v1(24.1,32) v1(28.9,32) ; v1@28.8,8 30.1,9.3
XIN: C0414.1 R0407.1 U0401.20 X0401.1 | length 7.5
  Top Layer w0.127: X0401.1@11.7,14.45 12.477,13.673 14.126,13.673 14.5,14.046 C0414.1 C0414.1 15.293,14.843 15.373,14.843 R0407.1 15.5,15.349 U0401.20
  Top Layer w0.254: X0401.1@11.7,14.45 X0401.1
XOSC_INT: C0415.2 R0406.1 X0401.3 | length 2.9
  Top Layer w0.127: X0401.3 13.3,12.529 13.723,12.952 C0415.2 C0415.2 15.293,12.157 15.373,12.157 R0406.1
XOUT: R0406.2 R0407.2 U0401.21 | length 4.6
  Top Layer w0.127: R0406.2 R0407.2 15.525,14.03 15.943,14.448 15.943,15.226 U0401.21
pads on no net: J0201. J0201.A8 J0201.B8 J0202. J0202.A5 J0202.A8 J0202.B5 J0202.B8 U0401.2 U0401.3 U0401.4 U0401.5 U0401.6 U0401.7 U0401.8 U0401.9

## Polygon pours and split planes (outlines as drawn)
+3V3D on Bottom Layer "NONET_L-01_P-001" (solid, pour order 1): 20,24 15,19 20,14 25,19
GND on Bottom Layer "NONET_L-01_P-001" (solid, pour order 0): 20,21.3 17.7,19 20,16.7 22.3,19
GND on Top Layer "NONET_L-01_P-001" (solid, pour order 4): 10.1,6.7 29.9,6.7 29.9,4.2 10.1,4.2
GND on Layer 2 "NONET_L-01_P-001" (solid, pour order 2): 8,40 32,40 32,4 8,4
GND on Layer 1 "NONET_L-01_P-001" (solid, pour order 3): 8,40 32,40 32,4 8,4

## Silkscreen, mask and mechanical layers (free items; w line width, h text height)
Top Overlay:
  circle w0.152: c22.5,27.75 r0.25
  circle w0.152: c17.5,27.75 r0.25
  circle w0.152: c29.25,20.5 r0.25
  lines w0.152: 11,20.75 11,21.25 ; 11,21 10.75,21 10.75,23 11,23 ; 11,22.75 11,23.25 ; 11.2,16.5 11,16.5 11,19.5 11.2,19.5 ; 11.25,23.5 11,23.5 11,24.5 11.25,24.5 ; 12.75,23.5 13,23.5 13,24.5 12.75,24.5 ; 12.8,16.5 13,16.5 13,19.5 12.8,19.5 ; 13,19.75 13,20.25 ; 13,20 13.25,20 13.25,22 ; 13,21.75 13,22.25 ; 13,22 13.25,22 ; 14,9.75 14.25,9.75 14.5,10 14.5,11.25 14.25,11 14.5,11 ; 14,11.5 15,11.5 ; 14,15.5 15,15.5 15,15.25 ; 15,11.75 15,11.5 ; 15,13.25 15,13.5 16,13.5 16,13.25 ; 15,28.25 15,28 16,28 16,28.25 ; 15,29.75 15,30 16,30 16,29.75 ; 15.35,15.55 15.65,15.85 ; 15.35,15.85 15.65,15.55 ; 15.5,11 15.75,11 15.5,11.25 15.5,10 15.75,9.75 16,9.75 ; 16,11.75 16,11.5 15,11.5 ; 19.5,11.2 19.5,11 22.5,11 22.5,11.2 ; 19.5,12.8 19.5,13 22.5,13 22.5,12.8 ; 23,28.25 23,28 25,28 25,28.25 ; 23,29.75 23,30 25,30 25,29.75 ; 25,24.25 25,24 27,24 ; 25,25.75 25,26 27,26 27,25.75 ; 27,24.25 27,24 ; 27.2,12.5 27,12.5 27,16.5 27.2,16.5 ; 27.25,22 27,22 27,24 ; 27.25,24 27,24 ; 28.75,22 29,22 29,24 28.75,24 ; 28.8,12.5 29,12.5 29,16.5 28.8,16.5 ; 9,32.25 8.5,31.75 9.5,31.75 9,32.25 ; 9,32.25 9,32.25 ; 13.25,22 13.25,22 ; 31,32.25 31.5,31.75 30.5,31.75 31,32.25 ; 31,32.25 31,32.25 ; 14,22 14.25,22.25 14.5,22 14.25,21.75 14,22 ; 14,23 14.25,23.25 14.5,23 14.25,22.75 14,23 ; 14.25,27.75 14.5,27.5 14.75,27.75 14.5,28 14.25,27.75 ; 16.25,13.25 16.5,13 16.75,13.25 16.5,13.5 16.25,13.25 ; 16.25,27.75 16.5,27.5 16.75,27.75 16.5,28 16.25,27.75 ; 17.25,13.25 17.5,13 17.75,13.25 17.5,13.5 17.25,13.25 ; 23.25,26.25 23.5,26.5 23.75,26.25 23.5,26 23.25,26.25 ; 23.75,13.25 24,13 24.25,13.25 24,13.5 23.75,13.25 ; 24.25,26.25 24.5,26 24.75,26.25 24.5,26.5 24.25,26.25 ; 25.25,27.75 25.5,27.5 25.75,27.75 25.5,28 25.25,27.75 ; 29,17.5 29.25,17.25 29.5,17.5 29.25,17.75 29,17.5 ; 29,21.5 29.25,21.25 29.5,21.5 29.25,21.75 29,21.5
  text "UART" at 8.5,31.348 h1 r270
  text "USB" at 30.5,31.348 h1 r270
  text "5K1" at 22.834,30.652 h1
  text "10K" at 14.25,30.402 h1
  text "27R4" at 27.402,25 h1
  text "1K" at 8.848,23.5 h1
  text "1u" at 29.402,23 h1
  text "A" at 9.681,21.5 h1
  text "B" at 13.652,20.5 h1
  text "SPI1" at 9.598,19.583 h1 r270
  text "FB" at 29.402,18.5 h1
  text "AIN" at 29.5,16.348 h1 r270
  text "FPC:30P" at 24.85,10.5 h1
  text "SPI0" at 19.251,9.598 h1
  text "15p" at 11.098,9.417 h1
  text "1K" at 16.402,9.25 h1
  text "P=0.5mm" at 24.85,9 h1
Bottom Overlay:
  drawing of 51249 lines, arcs and shapes, not listed
  text "LEGEND" at 14.419,30.75 h1
  text "100nF" at 14.401,28.75 h1
  text "10uF" at 13.401,27.25 h1
  text "DNP" at 12.818,25.75 h1
  text "3.1" at 30.848,19.5 h1
  text "415" at 30.848,18 h1
  text "92653" at 30.848,16.5 h1
  text "58979" at 30.848,15 h1
  text "323846" at 30.848,13.5 h1
  text "264338" at 30.848,12 h1
  text "327950" at 30.848,10.5 h1
  text "28841971693993" at 30.848,9 h1
  text "PAY 10CNY TO REMOVE:" at 30.996,7.25 h1
Mechanical 1:
  circle w0.152: c20,36 r2
  circle w0.254: c20,36 r1.1
  lines w0.254: 8,4 32,4 32,40 8,40 8,4
Drill Drawing:
  text ".Legend" at 33.154,4.862 h1.52

## Text inside footprints (layer, text, board x,y; h text height)
CR0201: Mechanical 13 "*" at 27.822,28.187 h1.27 r90
CR0202: Mechanical 13 "*" at 11.822,28.187 h1.27 r90
J0201: Mechanical 13 "PCB EDGE" at 21.3,39.9 h0.61 r180
J0202: Mechanical 13 "PCB EDGE" at 8.3,39.9 h0.61 r180
U0201: Mechanical 13 "*" at 20.239,29.914 h1.27 r270
U0401: Mechanical 13 "*" at 19.187,22.875 h1.27 r315